# Altium PCB AD637有效值模块.PcbDoc
Units mil, origin at the board's own origin, x right, y up, seen from the top; angles counter-clockwise.
Board outline 2070.03 x 1470.03 mil, 2 copper layers (TopLayer, BottomLayer); 34 components, 20 nets, 124 pads, 70 vias.
Unrouted connection lines stored in the file: 43.
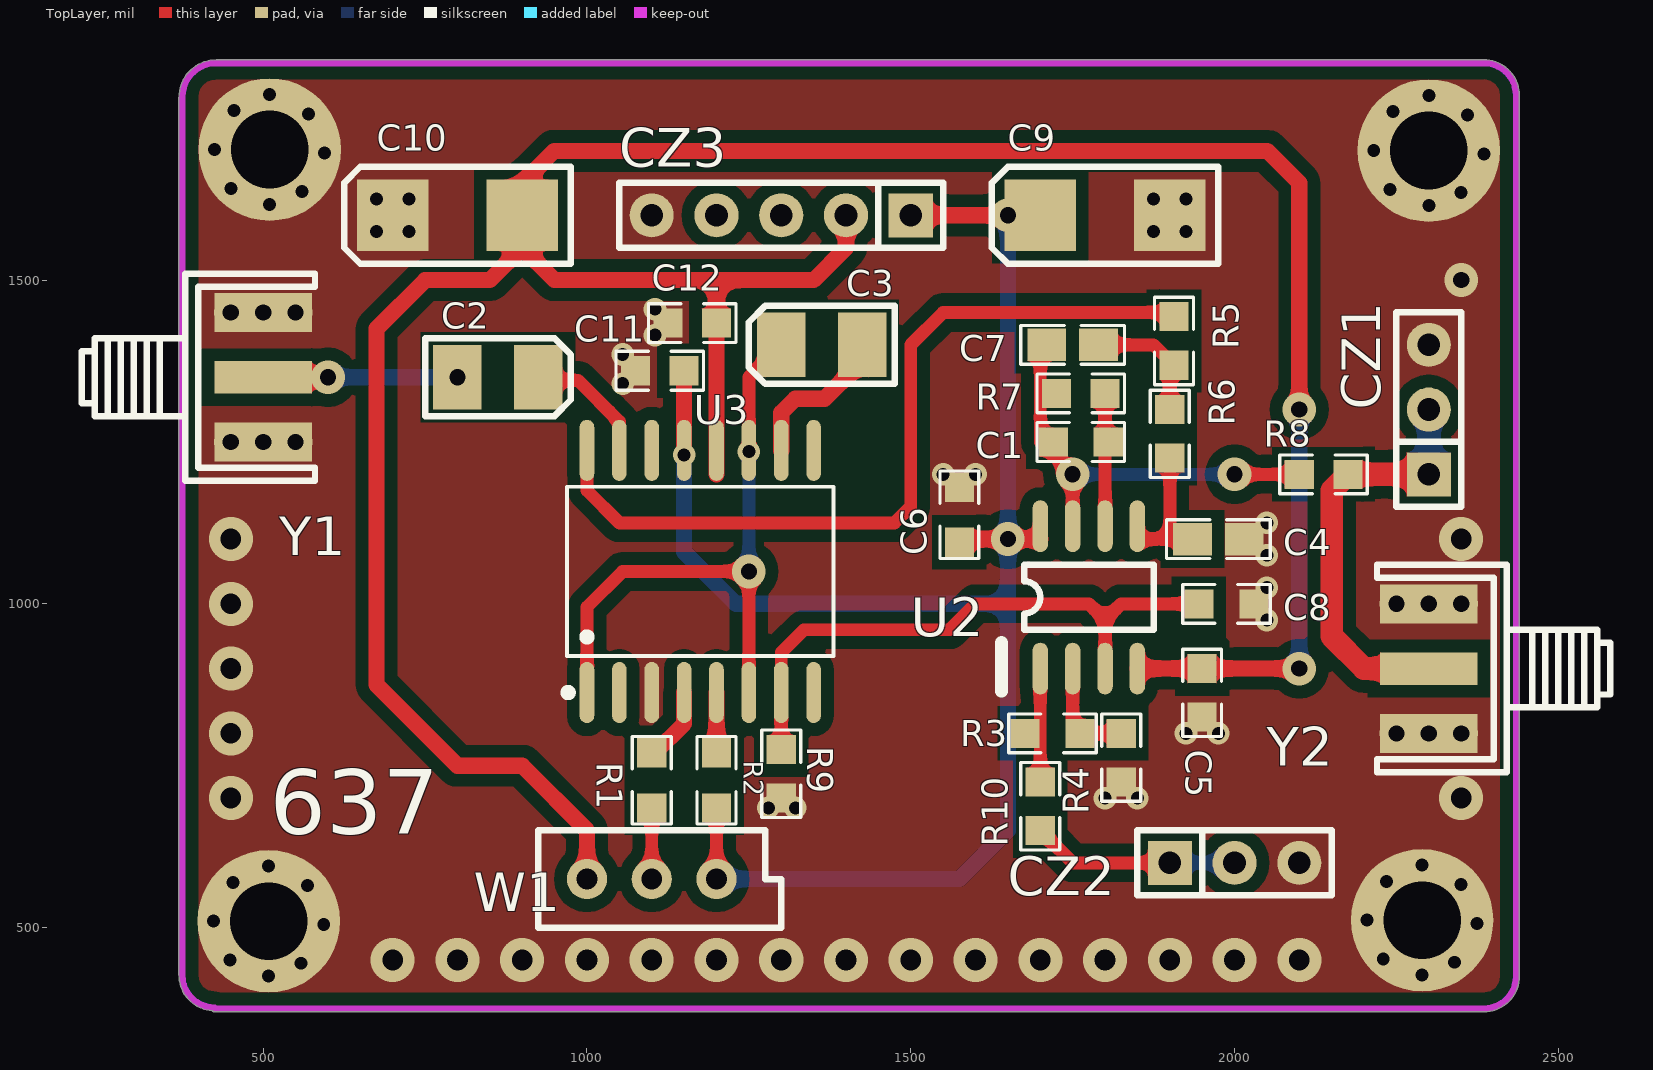
[diagram p0: TopLayer view]
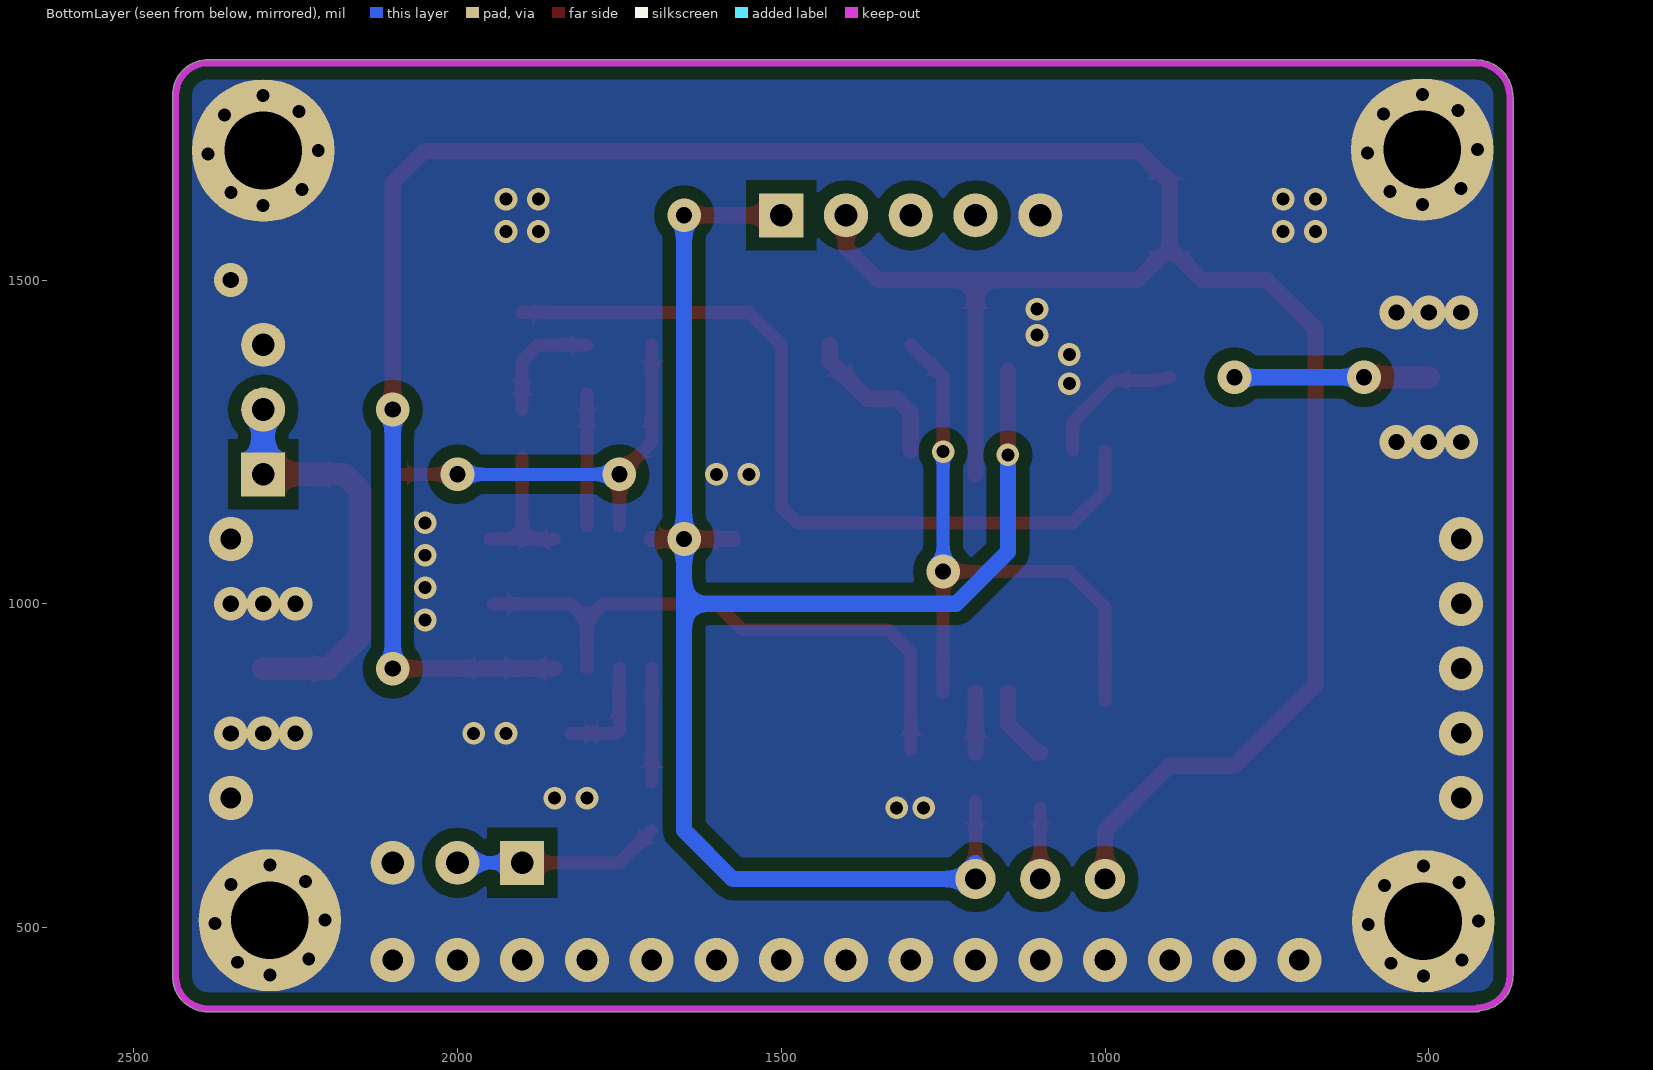
[diagram p1: BottomLayer view, seen from below]

## Layer stack, top to bottom
TopSolder: solder mask 0.4, Solder Resist, Dk 3.5
TopLayer: signal copper 1.4
Dielectric1: dielectric 12.6, FR-4, Dk 4.8
BottomLayer: signal copper 1.4
BottomSolder: solder mask 0.4, Solder Resist, Dk 3.5

## Board outline
421.25,371.67 cw(c425,426.56) 369.99,426.56 369.99,1782.68 cw(c427.32,1782.68) 427.32,1840.02 2385,1840.02 cw(c2385,1785) 2440.01,1785 2440.01,425 cw(c2385,425) 2385,369.99 425,369.98 cw(c425,375)

## Design rules (kind name [scope] priority, off if disabled: settings)
Clearance Clearance_1 [All] p1: gap=20 ignorepadtopadclearanceinfootprint=FALSE
Clearance [All] p2 off: gap=8 ignorepadtopadclearanceinfootprint=FALSE
ComponentClearance [All] p1: gap=2 collisioncheckmode=3 verticalgap=10 showdistances=FALSE
FabricationTestPointUsage TestPointUsage [All] p1: valid=0 allowmultiple=FALSE
FabricationTestpoint Testpoint [All] p1: side=3 testpointundercomponent=TRUE minsize=40 maxsize=100 preferedsize=60 minholesize=20 maxholesize=40 preferedholesize=32 testpointgrid=1 allowsidetop=TRUE allowsidebottom=TRUE usegrid=TRUE gridtolerance=0.01
HoleSize [All] p1: absolutevalues=TRUE maxlimit=150 minlimit=5 maxpercent=80.000 minpercent=20.000
PlaneConnect [All] p1: planeconnectstyle=Direct reliefexpansion=20 reliefentries=4 reliefconductorwidth=10 reliefairgap=10
PolygonConnect PolygonConnect_1 [All] p1: connectstyle=Direct reliefconductorwidth=25 reliefentries=4 polygonreliefangle="90 Angle" airgapwidth=10
PolygonConnect [All] p2 off: connectstyle=Direct reliefconductorwidth=35 reliefentries=4 polygonreliefangle="90 Angle" airgapwidth=10
RoutingVias [All] p1: holewidth=20 width=35 viastyle="Through Hole" minholewidth=15 minwidth=30 maxholewidth=150 maxwidth=250
SolderMaskExpansion [All] p1: expansion=4
Width [All] p1: maxlimit=100 minlimit=8 preferedwidth=20
25 further rules are at their usual default settings.

## Classes and differential pairs
component class AD637: C1 C2 C3 C4 C5 C6 C7 C8 C9 C10 CZ1 CZ2 CZ3 R1 R2 R3 R4 R5 R6 R7 R8 R9 R10 U2 W1 Y1 Y2

## Components (designator, comment, footprint, x,y, rotation, side; value= is the part's Value field where it differs from the comment)
C1 "1n" 0805D#1 1800,1250 r180 top
C2 "22u" SMDECB 925,1350 r270 top
C3 "4.7u" SMDECB 1300,1400 r90 top
C4 "0.1u" 0805 2025,1100 r180 top
C5 "0.1u" 0805D#2 1950,900 r270 top
C6 "0.1u" 0805D#1 1575,1100 r90 top
C7 "0.1u" 0805 1700,1400 r0 top
C8 "0.1u" 0805D#1 1950,1000 r0 top
C9 "100u" SMDECC 1700,1600 r270 top
C10 "100u" SMDECC 700,1600 r270 top
C11 "0.1u" 0805D#2 1150,1360 r180 top
C12 "0.1u" 0805D#2 1200,1433.47 r180 top
CZ1 "RMS OUT" SIP3 2300,1200 r90 top
CZ2 "dB OUT" SIP3 1900,600 r0 top
CZ3 "PWR" SIP5 1500,1600 r180 top
R1 "1M" 0805D#1 1100.02,765 r270 top
R2 "4.7K" 0805D#1 1200.02,765 r270 top
R3 "10K" 0805D#1 1681.29,800 r0 top
R4 "10K" 0805D#2 1825,800 r270 top
R5 "510K" 0805D#2 1906.53,1443.47 r270 top
R6 "510K" 0805D#2 1900,1300 r270 top
R7 "1M" 0805D#2 1725,1325 r0 top
R8 "100" 0805D#2 2100,1200 r0 top
R9 "100K" 0805D#2 1300,700 r90 top
R10 "100" 0805D#2 1700,725 r270 top
U2 "OPA2277" SO-8 1700,900 r90 top
U3 "SOIC-16_L10.3-W7.5-P1.27-LS10.3-BL" SOIC-16_L10.3-W7.5-P1.27-LS10.3-BL 1175,1050 r0 top (schematic designator U1)
W1 "50K" VRC 1000.02,575 r0 top
Y1 "RF IN" SMA1 500,1450 r0 top
Y2 "RMS OUT" SMA1 2300,800 r180 top
? "Comment" 铜柱1 2985.33,1583.44 r270 top
? "Comment" 铜柱1 1193.84,393.44 r270 top
? "Comment" 铜柱1 1195.33,1584.97 r270 top
? "Comment" 铜柱1 2975,395 r270 top

## Footprints (in the part's own frame and the unit in brackets; to place one, negate y for a bottom-side part, rotate by r counter-clockwise, add the part's x,y. Pads: shape width x height; smd on the part's side, far side on the other; paste and mask are expansions set on the pad)
0805 [mil]
  rect 60x50 smd: 1(10,0) 2(90,0)
  silkscreen extent -30,-30 130,30
0805D#1 [mil]
  rect 45x45 smd: 1(-5,0) 2(80,0)
  silkscreen extent -30,-30 105,30
0805D#2 [mil]
  rect 45x45 smd: 1(0,0) 2(75,0)
  silkscreen extent -30,-30 105,30
SIP3 [mil]
  rect 68x68 hole 35: 1(0,0)
  round 68 hole 35: 2(100,0) 3(200,0)
  silkscreen extent -50,-50 250,50
SIP5 [mil]
  rect 68x68 hole 35: 1(0,0)
  round 68 hole 35: 2(100,0) 3(200,0) 4(300,0) 5(400,0)
  silkscreen extent -50,-50 450,50
SMA1 [mil]
  rect 150x50 smd: 1(0,-100)
  rect 150x60 smd: 2(0,-200) 2(0,0)
  silkscreen extent -280,-260 80,60
SMDECB [mil]
  rect 100x75 smd: 1(0,0) 2(0,-125)
  silkscreen extent -60,-175 60,50
SMDECC [mil]
  rect 110x110 smd: 1(0,0) 2(0,200)
  silkscreen extent -75,-75 75,275
SO-8 [mil]
  oval 80x24 smd: 1(0,0) 2(0,-50) 3(0,-100) 4(0,-150) 5(220,-150) 6(220,-100) 7(220,-50) 8(220,0)
  silkscreen extent 60,-175 160,25
SOIC-16_L10.3-W7.5-P1.27-LS10.3-BL [mil]
  oval 22.6x94.51 smd: 1(-175,-187.02) 2(-125,-187.02) 3(-75,-187.02) 4(-25,-187.02) 5(25,-187.02) 6(75,-187.02) 7(125,-187.02) 8(175,-187.02) 9(175,187.02) 10(125,187.02) 11(75,187.02) 12(25,187.02) 13(-25,187.02) 14(-75,187.02) 15(-125,187.02) 16(-175,187.02)
  silkscreen extent -210,-193 206,131
VRC [mil]
  round 62 hole 32: 1(0,0) 2(200,0) W(100,0)
  silkscreen extent -75,-75 300,75
铜柱1 [mil]
  round 220 hole 120: 0(-116.56,-685.33)
  round 40 hole 20: 8(-201.56,-685.33) 8(-176.56,-740.33) 8(-171.56,-625.33) 8(-116.56,-770.33) 8(-111.56,-600.33) 8(-56.56,-745.33) 8(-51.56,-635.33)
  round 40 hole 20 paste+0: 8(-31.56,-685.33)

## Via types
v1: diameter 35, hole 20, TopLayer to BottomLayer, 26 vias
v2: diameter 52, hole 25, TopLayer to BottomLayer, 22 vias
v3: diameter 68, hole 32, TopLayer to BottomLayer, 22 vias

## Nets (pads, with @x,y where several pads share a name; then routed paths per layer and width w, separated by ;. In a path a pad name is that pad's centre, name@x,y a point inside that pad or via, vN(x,y) a via of type N, cw(c..) or ccw(c..) an arc to the next point about the centre after c; other vN are vias at no path point)
+12V: C6.1 C9.1 C11.1 CZ3.1 R2.2 U2.8 U3.13 W1.2 | length 2642.6
  TopLayer w20: W1.2 R2.2@1200,695
  TopLayer w25: U3.13 C11.1 ; CZ3.1 v2(1650,1600) ; C6.1@1575,1100 v2(1650,1100) U2.8@1700,1100
  BottomLayer w25: v1(1150.02,1230.05) 1150,1080 1230,1000 1650,1000 ; W1.2@1200,600 1225,575 1575,575 1650,650 1650,1000 ; v2(1650,1600) v2(1650,1100) 1650,1000
-12V: C5.1 C10.2 C12.1 CZ3.2 U2.4 U3.12 W1.1 | length 4552.3
  TopLayer w25: W1.1 1000,650 900,750 800,750 675,875 675,1425 750,1500 850,1500 C10.2@900,1550 ; U3.12@1200.02,1200.05 1200.02,1299.98 C12.1 1200,1500 ; CZ3.2 1400,1550 1350,1500 1200,1500 ; U2.4 C5.1 v2(2100,900) ; v2(2100,1300) 2100,1650 2050.5,1699.5 949.5,1699.5 900,1650 C10.2 C10.2@900,1550 ; C10.2@900,1550 950,1500 1200,1500
  BottomLayer w25: v2(2100,900) v2(2100,1300)
GND: ?.0 ?.8 C4.1 C5.2 C6.2 C8.2 C9.2 C10.1 C11.2 C12.2 CZ1.3 CZ2.3 CZ3.5 R4.2 R9.1 U3.3 Y1.2 Y2.2
  other v1: 1280,685 1321.77,685 1800,700 1850,700 1925,800 1975,800 2050,975 2050,1025 2050,1075 2050,1125 1550,1200 1600,1200 1055,1340 1055,1385 1105,1415 1105,1455 675,1575 725,1575 1875,1575 1925,1575 675,1625 725,1625 1875,1625 1925,1625
  other v2: 2250,800 2300,800 2350,800 2250,1000 2300,1000 2350,1000 450,1250 500,1250 550,1250 450,1450 500,1450 550,1450 2350,1500
  other v3: 700,450 800,450 900,450 1000,450 1100,450 1200,450 1300,450 1400,450 1500,450 1600,450 1700,450 1800,450 1900,450 2000,450 2100,450 450,700 2350,700 450,800 450,900 450,1000 450,1100 2350,1100
NetC1_2: C1.2 C7.1 R7.1 R8.1 U2.7 | length 650.7
  TopLayer w20: C7.1@1700,1400 1700,1250 v2(1750,1200) U2.7 ; v2(2000,1200) R8.1
  BottomLayer w20: v2(1750,1200) v2(2000,1200)
NetC2_1: C2.1 U3.15 | length 221.2
  TopLayer w20: C2.1@900,1350 924.04,1345.19 925,1345 986.38,1345 1050,1281.38 U3.15
NetC4_2: C4.2 R6.2 U2.5 | length 225
  TopLayer w20: U2.5@1850,1100 C4.2@1950,1100 ; 1900,1100 R6.2
NetCZ1_1: CZ1.1 CZ1.2 R8.2 Y2.1 | length 656.1
  TopLayer w35: Y2.1 2200,900 2150,950 2150,1175 R8.2 CZ1.1
  BottomLayer w35: CZ1.1 CZ1.2
NetCZ2_1: CZ2.1 CZ2.2 R10.2 | length 320.7
  TopLayer w20: R10.2 1750,600 CZ2.1
  BottomLayer w20: CZ2.1 CZ2.2
NetR1_1: R1.1 U3.4 | length 116.6
  TopLayer w25: R1.1 1104.91,770 1150,815.09 U3.4
NetR1_2: R1.2 W1.W | length 110
  TopLayer w20: W1.W R1.2
NetR2_1: R2.1 U3.5 | length 93
  TopLayer w25: R2.1 U3.5
NetR3_1: R3.1 R10.1 U2.1 | length 175
  TopLayer w20: R10.1 U2.1
NetR5_2: C7.2 R5.2 R6.1 | length 185.4
  TopLayer w20: C7.2@1800,1400 1875,1400 1900,1375 R6.1
NetR7_2: C1.1 R7.2 U2.6 | length 205
  TopLayer w20: U2.6 R7.2
NetR9_2: C8.1 R9.2 U2.3 U3.7 | length 921.8
  TopLayer w20: R9.2 U3.7 1300,925 1335,960 1560,960 1600,1000 1775,1000 1800,975 ; U2.3 1800,975 ; C8.1 1825,1000 1800,975
NetU1_1: C3.1 U3.1 U3.6 U3.11 | length 973.6
  TopLayer w20: U3.1@1000,850 U3.1 1000,995 1055.02,1050.02 v2(1250.03,1050.02) ; U3.6 v2(1250.03,1050.02) ; U3.11 1250,1350 C3.1
  BottomLayer w20: v2(1250.03,1050.02) v1(1250.02,1235.05)
NetU1_8: C3.2 U3.10 | length 241.1
  TopLayer w25: U3.10 1300,1295 1321.77,1316.77 1366.77,1316.77 1425,1375 C3.2
NetU1_14: R5.1 U3.16 | length 1263.8
  TopLayer w20: U3.16 1000,1175 1050,1125 1475,1125 1500,1150 1500,1400 1550,1450 R5.1@1900,1450
NetU2_2: R3.2 R4.1 U2.2 | length 165
  TopLayer w20: R3.2@1750,805 U2.2 ; R3.2@1755,800 R4.1
NetY1_1: C2.2 Y1.1 | length 300
  TopLayer w35: Y1.1 v2(600,1350)
  BottomLayer w25: v2(600,1350) v2(800,1350)
pads on no net: CZ3.3 CZ3.4 U3.2 U3.8 U3.9 U3.14

## Polygon pours and split planes (outlines as drawn)
GND on BottomLayer "TopLayer-No Net2" (solid, remove dead copper, pour order 9): 375,375 375,1825 2425,1825 2425,375
GND on TopLayer "TopLayer-No Net" (solid, remove dead copper, pour order 10): 421.25,371.67 cw(c425,426.56) 369.99,426.56 369.99,1782.68 cw(c427.32,1782.68) 427.32,1840.02 2385,1840.02 cw(c2385,1785) 2440.01,1785 2440.01,425 cw(c2385,425) 2385,369.99 425,369.98 cw(c425,375)

## Keep-outs
KeepOutLayer:
  lines w10: 425,375 2385,375 ccw(c2385,425) 2435,425 2435,1785 ccw(c2385,1785) 2385,1835 427.32,1835 ccw(c427.32,1782.68) 375,1782.68 375,426.56 ccw(c425,426.56) 425,376.56

## Other copper
TopLayer:
  pour cut-out: 1831.7,959.51 1831.25,959.96 1831.25,963.46 1837.53,969.74 1902.5,969.74 1902.5,957.5 1987.5,957.5 1987.5,947.5 1992.5,942.5 1907.5,942.5 1907.5,932.78 1877.22,932.78 1850.49,959.51
  pour cut-out: 890,1440
  pour cut-out: 890,1440
  pour cut-out: 890,1440
  pour cut-out: 857.5,1420 867.5,1420 867.5,1280 855,1280 855,1417.5

## Silkscreen, mask and mechanical layers (free items; w line width, h text height)
TopOverlay:
  lines w10: 1635,940 1640,940
  lines w20: 1640,865 1640,940
  text "637" at 510,645 h100
Mechanical1:
  lines w10: 374,427 ccw(c424,427) 424,377 2386,377 ccw(c2386,427) 2436,427 2436,1784 ccw(c2386,1784) 2386,1834 509,1834 424,1834 ccw(c424,1784) 374,1784 374,427